# Altium PCB PCBDesign.PcbDoc
Units mm, origin at the board's own origin, x right, y up, seen from the top; angles counter-clockwise.
Board outline 90 x 50 mm, 2 copper layers (Top Layer, Bottom Layer); 10 components, 14 nets, 63 pads, 0 vias.
Unrouted connection lines stored in the file: 1.
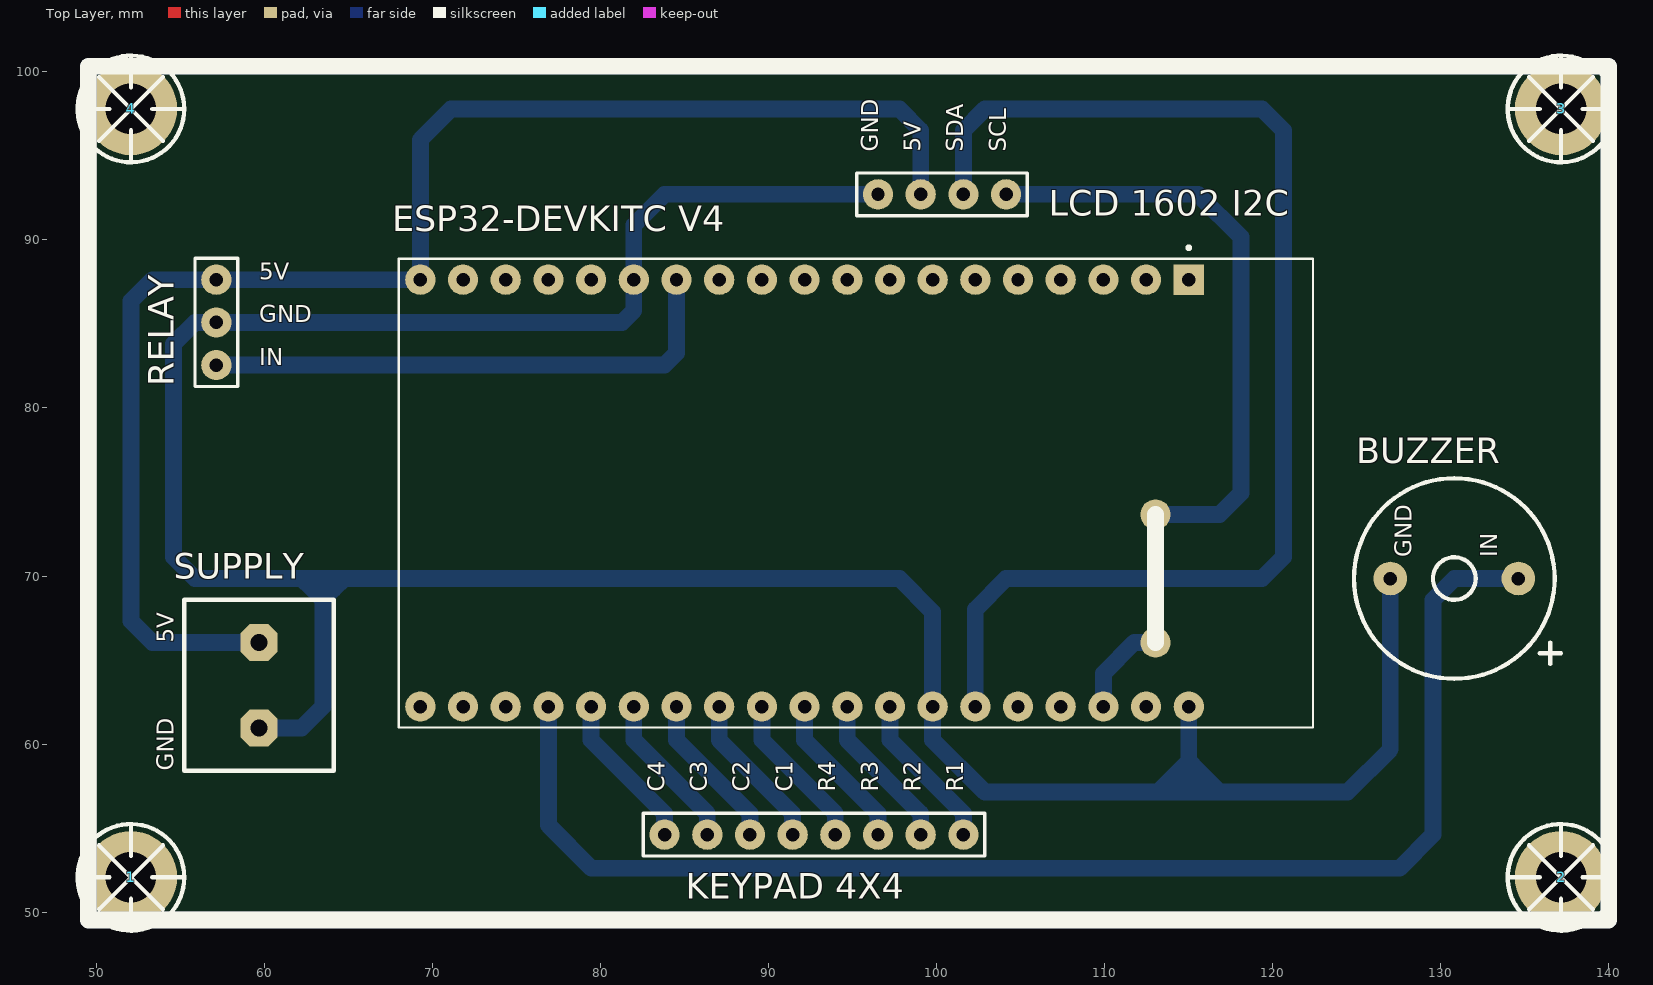
[diagram p0: Top Layer view]
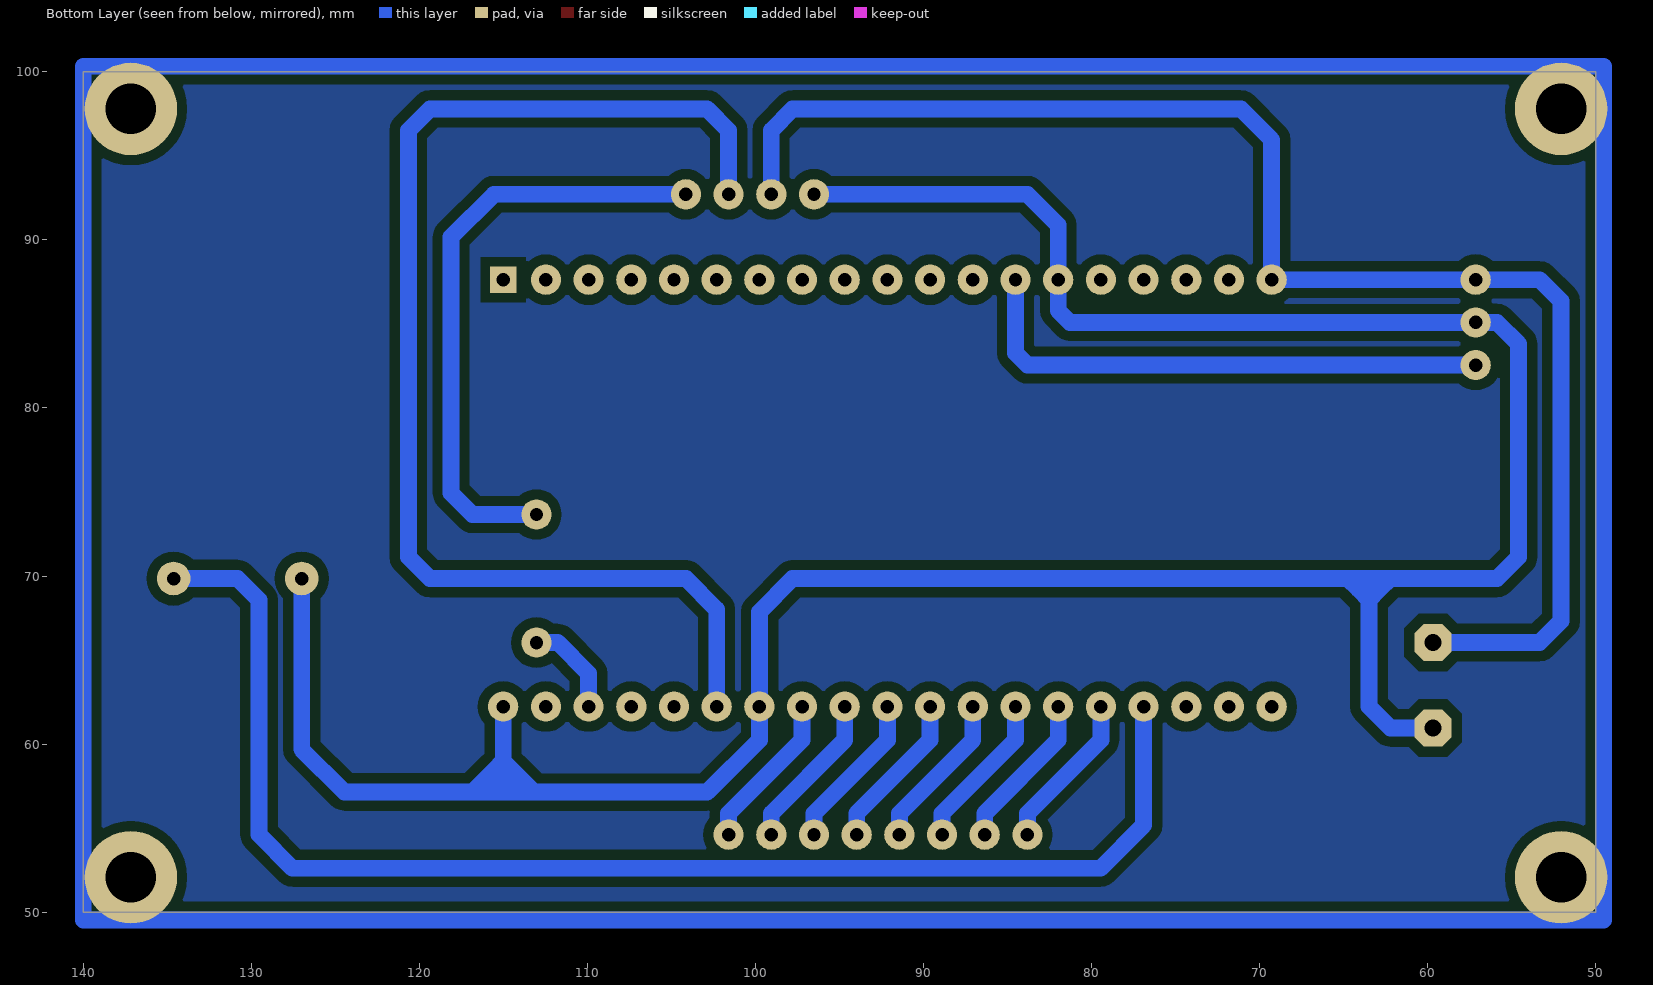
[diagram p1: Bottom Layer view, seen from below]

## Layer stack, top to bottom
Top Solder: solder mask 0.0102, Solder Resist, Dk 3.5
Top Layer: signal copper 0.0356
Dielectric 1: dielectric 0.32, FR-4, Dk 4.8
Bottom Layer: signal copper 0.0356
Bottom Solder: solder mask 0.0102, Solder Resist, Dk 3.5

## Board outline
50,100 140,100 140,50 50,50 50,100

## Design rules (kind name [scope] priority, off if disabled: settings)
Clearance [All] p1: gap=0.6
PolygonConnect [All] p1: connectstyle=Relief reliefconductorwidth=0.254 reliefentries=4 polygonreliefangle="90 Angle" airgapwidth=0.254
RoutingVias [All] p1: holewidth=0.711 width=1.27 viastyle="Through Hole" minholewidth=0.711 minwidth=1.27 maxholewidth=0.711 maxwidth=1.27
SolderMaskExpansion [All] p1: expansion=0.102
Width [All] p1: maxlimit=1 minlimit=0.6 preferedwidth=0.8
30 further rules are at their usual default settings.

## Components (designator, comment, footprint, x,y, rotation, side; value= is the part's Value field where it differs from the comment)
1 "Spacer" Spacer 52.07,52.07 r90 top
2 "Spacer" Spacer 137.16,52.07 r90 top
3 "Spacer" Spacer 137.16,97.79 r90 top
4 "Spacer" Spacer 52.07,97.79 r90 top
5V "SUPPLY 5V" "Term.Block 2pin" 59.69,63.5 r270 top (schematic designator P3)
BUZZER "Buzzer" BUZZER 130.81,69.85 r180 top (schematic designator LS1)
"ESP32-DEVKITC V4" "ESP32-DEVKITC-32D" MODULE_ESP32-DEVKITC-32D 95.25,74.93 r270 top (schematic designator U1)
"KEYPAD 4X4" "KEYPAD" HDR1X8 83.82,54.61 r0 top (schematic designator P1)
"LCD 1602 I2C" "LCD 16X2 I2C" HDR1X4 104.14,92.71 r180 top (schematic designator P2)
RELAY "RELAY" HDR1X3 57.15,87.63 r270 top (schematic designator P4)

## Footprints (in the part's own frame and the unit in brackets; to place one, negate y for a bottom-side part, rotate by r counter-clockwise, add the part's x,y. Pads: shape width x height; smd on the part's side, far side on the other; paste and mask are expansions set on the pad)
BUZZER [mm]
  round 2 hole 0.8: 1(-3.81,0) 2(3.81,0)
  silkscreen extent -6.35,-5.97 5.97,5.97
HDR1X3 [mm] "Connector; Header; 3 Position"
  round 1.8 hole 0.8: 1(0,0) 2(2.54,0) 3(5.08,0)
  silkscreen extent -1.27,-1.27 6.35,1.27
HDR1X4 [mm] "Connector; Header; 4 Position"
  round 1.8 hole 0.8: 1(0,0) 2(2.54,0) 3(5.08,0) 4(7.62,0)
  silkscreen extent -1.27,-1.27 8.89,1.27
HDR1X8 [mm] "Connector; Header; 8 Position"
  round 1.8 hole 0.8: 1(0,0) 2(2.54,0) 3(5.08,0) 4(7.62,0) 5(10.16,0) 6(12.7,0) 7(15.24,0) 8(17.78,0)
  silkscreen extent -1.27,-1.27 19.05,1.27
MODULE_ESP32-DEVKITC-32D [mm]
  rect 1.8x1.8 / inner round 1.56 / far side rect 1.56x1.56 hole 0.8: J2-1(-12.7,19.76)
  round 1.8 hole 0.8: J2-2(-12.7,17.22) J2-3(-12.7,14.68) J2-4(-12.7,12.14) J2-5(-12.7,9.6) J2-6(-12.7,7.06) J2-7(-12.7,4.52) J2-8(-12.7,1.98) J2-9(-12.7,-0.56) J2-10(-12.7,-3.1) J2-11(-12.7,-5.64) J2-12(-12.7,-8.18) J2-13(-12.7,-10.72) J2-14(-12.7,-13.26) J2-15(-12.7,-15.8) J2-16(-12.7,-18.34) J2-17(-12.7,-20.88) J2-18(-12.7,-23.42) J2-19(-12.7,-25.96) J3-1(12.7,19.76) J3-2(12.7,17.22) J3-3(12.7,14.68) J3-4(12.7,12.14) J3-5(12.7,9.6) J3-6(12.7,7.06) J3-7(12.7,4.52) J3-8(12.7,1.98) J3-9(12.7,-0.56) J3-10(12.7,-3.1) J3-11(12.7,-5.64) J3-12(12.7,-8.18) J3-13(12.7,-10.72) J3-14(12.7,-13.26) J3-15(12.7,-15.8) J3-16(12.7,-18.34) J3-17(12.7,-20.88) J3-18(12.7,-23.42) J3-19(12.7,-25.96)
  silkscreen extent -14.7,-27.25 13.95,27.15, body extent -13.97,-27.9 13.97,27.2, height 6.69
Spacer [mm]
  round 5.5 hole 3: 0(0,0)
  silkscreen extent -3.17,-3.17 3.17,3.17
"Term.Block 2pin" [mm]
  oct 2.2x2.2 hole 1: 0(-2.54,0) 1(2.54,0)
  silkscreen extent -5.08,-4.45 5.08,4.45

## Part data
5V: library part "Term.Block 2pin", "Term.Block, 2-Pin"
BUZZER: "Magnetic Transducer Buzzer"
"ESP32-DEVKITC V4": "WiFi Development Tools (802.11) ESP32 General Development Kit, ESP32-WROOM-32D on the board"
"KEYPAD 4X4": library part "Header 8", "Header, 8-Pin"
"LCD 1602 I2C": library part "Header 4", "Header, 4-Pin"
RELAY: library part "Header 3", "Header, 3-Pin"

## Free pads (board coordinates)
  round 1.8 hole 0.8: 3(113.03,66.04) 4(113.03,73.66)

## Nets (pads, with @x,y where several pads share a name; then routed paths per layer and width w, separated by ;. In a path a pad name is that pad's centre, name@x,y a point inside that pad or via, vN(x,y) a via of type N, cw(c..) or ccw(c..) an arc to the next point about the centre after c; other vN are vias at no path point)
BUZZER: "ESP32-DEVKITC V4.J3-16" BUZZER.1 | length 81.2
  Bottom Layer w1: 76.91,62.23 76.91,55.17 79.47,52.61 127.54,52.61 129.54,54.61 129.54,68.58 130.81,69.85 BUZZER.1
C1: "ESP32-DEVKITC V4.J3-12" "KEYPAD 4X4.4" | length 9.4
  Bottom Layer w1: 87.07,62.23 87.07,60.25 91.44,55.88 91.44,54.61
C2: "ESP32-DEVKITC V4.J3-13" "KEYPAD 4X4.3" | length 9.4
  Bottom Layer w1: 84.53,62.23 84.53,60.25 88.9,55.88 88.9,54.61
C3: "ESP32-DEVKITC V4.J3-14" "KEYPAD 4X4.2" | length 9.4
  Bottom Layer w1: 81.99,62.23 81.99,60.25 86.36,55.88 86.36,54.61
C4: "ESP32-DEVKITC V4.J3-15" "KEYPAD 4X4.1" | length 9.4
  Bottom Layer w1: 79.45,62.23 79.45,60.25 83.82,55.88 83.82,54.61
GND: 5V.1 "ESP32-DEVKITC V4.J2-14" "ESP32-DEVKITC V4.J3-1" "ESP32-DEVKITC V4.J3-7" "LCD 1602 I2C.4" BUZZER.2 RELAY.2 | length 184.7
  Bottom Layer w1: 5V.1 62.23,60.96 63.5,62.23 63.5,68.58 ; 96.52,92.71 83.82,92.71 81.99,90.88 81.99,87.63 81.99,85.8 81.28,85.09 RELAY.2 55.88,85.09 54.61,83.82 54.61,71.12 55.88,69.85 62.23,69.85 ; 113.18,57.15 114.375,58.345 ; 115.01,62.23 115.01,58.98 ; BUZZER.2 127,59.69 124.46,57.15 116.84,57.15 ; 62.23,69.85 63.5,69.85 ; 62.23,69.85 62.865,69.215 ; 62.865,69.215 63.5,69.215 ; 62.865,69.215 63.5,68.58 ; 63.5,68.58 63.5,69.215 ; 63.5,68.58 64.135,69.215 ; 63.5,69.215 63.5,69.85 ; 63.5,69.215 64.135,69.215 ; 63.5,69.85 64.77,69.85 ; 63.5,69.85 64.135,69.215 ; 64.135,69.215 64.77,69.85 ; 64.77,69.85 97.79,69.85 99.77,67.87 99.77,62.23 99.77,60.25 102.87,57.15 114.3,57.15 ; 114.3,57.15 115.57,57.15 ; 114.3,57.15 114.935,57.785 ; 114.375,58.345 115.01,58.98 ; 114.375,58.345 114.935,57.785 ; 114.935,57.785 115.57,57.15 ; 114.935,57.785 115.57,58.42 ; 115.01,58.98 115.57,58.42 ; 115.57,57.15 116.84,57.15 ; 115.57,58.42 116.84,57.15
R1: "ESP32-DEVKITC V4.J3-8" "KEYPAD 4X4.8" | length 9.4
  Bottom Layer w1: 97.23,62.23 97.23,60.25 101.6,55.88 101.6,54.61
R2: "ESP32-DEVKITC V4.J3-9" "KEYPAD 4X4.7" | length 9.4
  Bottom Layer w1: 94.69,62.23 94.69,60.25 99.06,55.88 99.06,54.61
R3: "ESP32-DEVKITC V4.J3-10" "KEYPAD 4X4.6" | length 9.4
  Bottom Layer w1: 92.15,62.23 92.15,60.25 96.52,55.88 96.52,54.61
R4: "ESP32-DEVKITC V4.J3-11" "KEYPAD 4X4.5" | length 9.4
  Bottom Layer w1: 89.61,62.23 89.61,60.25 93.98,55.88 93.98,54.61
RELAY: "ESP32-DEVKITC V4.J2-13" RELAY.3 | length 32
  Bottom Layer w1: RELAY.3 83.82,82.55 84.53,83.26 84.53,87.63
SCL: "ESP32-DEVKITC V4.J3-3" "LCD 1602 I2C.1" pad.3 pad.4 | length 41.7
  Bottom Layer w1: 104.14,92.71 115.57,92.71 118.11,90.17 118.11,74.93 116.84,73.66 pad.4 ; 109.93,62.23 109.93,64.21 111.76,66.04 pad.3
SDA: "ESP32-DEVKITC V4.J3-6" "LCD 1602 I2C.2" | length 74.7
  Bottom Layer w1: 101.6,92.71 101.6,96.52 102.87,97.79 119.38,97.79 120.65,96.52 120.65,71.12 119.38,69.85 104.14,69.85 102.31,68.02 102.31,62.23
VCC: 5V.0 "ESP32-DEVKITC V4.J2-19" "LCD 1602 I2C.3" RELAY.1 | length 88.1
  Bottom Layer w1: 5V.0 53.34,66.04 52.07,67.31 52.07,86.36 53.34,87.63 RELAY.1 69.29,87.63 69.29,95.96 71.12,97.79 97.79,97.79 99.06,96.52 99.06,92.71
pads on no net: 1.0 2.0 3.0 4.0 "ESP32-DEVKITC V4.J2-1" "ESP32-DEVKITC V4.J2-2" "ESP32-DEVKITC V4.J2-3" "ESP32-DEVKITC V4.J2-4" "ESP32-DEVKITC V4.J2-5" "ESP32-DEVKITC V4.J2-6" "ESP32-DEVKITC V4.J2-7" "ESP32-DEVKITC V4.J2-8" "ESP32-DEVKITC V4.J2-9" "ESP32-DEVKITC V4.J2-10" "ESP32-DEVKITC V4.J2-11" "ESP32-DEVKITC V4.J2-12" "ESP32-DEVKITC V4.J2-15" "ESP32-DEVKITC V4.J2-16" "ESP32-DEVKITC V4.J2-17" "ESP32-DEVKITC V4.J2-18" "ESP32-DEVKITC V4.J3-2" "ESP32-DEVKITC V4.J3-4" "ESP32-DEVKITC V4.J3-5" "ESP32-DEVKITC V4.J3-17" "ESP32-DEVKITC V4.J3-18" "ESP32-DEVKITC V4.J3-19"
copper on no net: | length 282.5
  Bottom Layer w1: 49.53,49.53 49.53,100.33 140,100.33 140,49.53 49.53,49.53

## Polygon pours and split planes (outlines as drawn)
no net on Bottom Layer "Top Layer-No Net" (solid, pour order 4): 49.53,100.33 49.53,49.53 140,49.53 140,100.33 49.53,100.33

## Silkscreen, mask and mechanical layers (free items; w line width, h text height)
Top Overlay:
  lines w1: 113.03,66.04 113.03,73.66 ; 49.53,49.53 140,49.53 140,100.33 49.53,100.33 49.53,49.53
  text "GND" at 96.52,95.25 h1 r90
  text "5V" at 99.06,95.25 h1 r90
  text "SDA" at 101.6,95.25 h1 r90
  text "SCL" at 104.14,95.25 h1 r90
  text "5V" at 59.69,87.63 h1
  text "GND" at 59.69,85.09 h1
  text "IN" at 59.69,82.55 h1
  text "GND" at 128.27,71.12 h1 r90
  text "IN" at 133.35,71.12 h1 r90
  text "SUPPLY" at 54.61,69.85 h1.52
  text "GND" at 54.61,58.42 h1 r90
  text "C4" at 83.82,57.15 h1 r90
  text "C3" at 86.36,57.15 h1 r90
  text "C2" at 88.9,57.15 h1 r90
  text "C1" at 91.44,57.15 h1 r90
  text "R4" at 93.98,57.15 h1 r90
  text "R3" at 96.52,57.15 h1 r90
  text "R2" at 99.06,57.15 h1 r90
  text "R1" at 101.6,57.15 h1 r90